# Altium PCB EDR_RFID_READER.PcbDoc
Units mm, origin at the board's own origin, x right, y up, seen from the top; angles counter-clockwise.
Board outline 40 x 62.01 mm, 2 copper layers (Top Layer, Bottom Layer); 23 components, 18 nets, 87 pads, 31 vias.
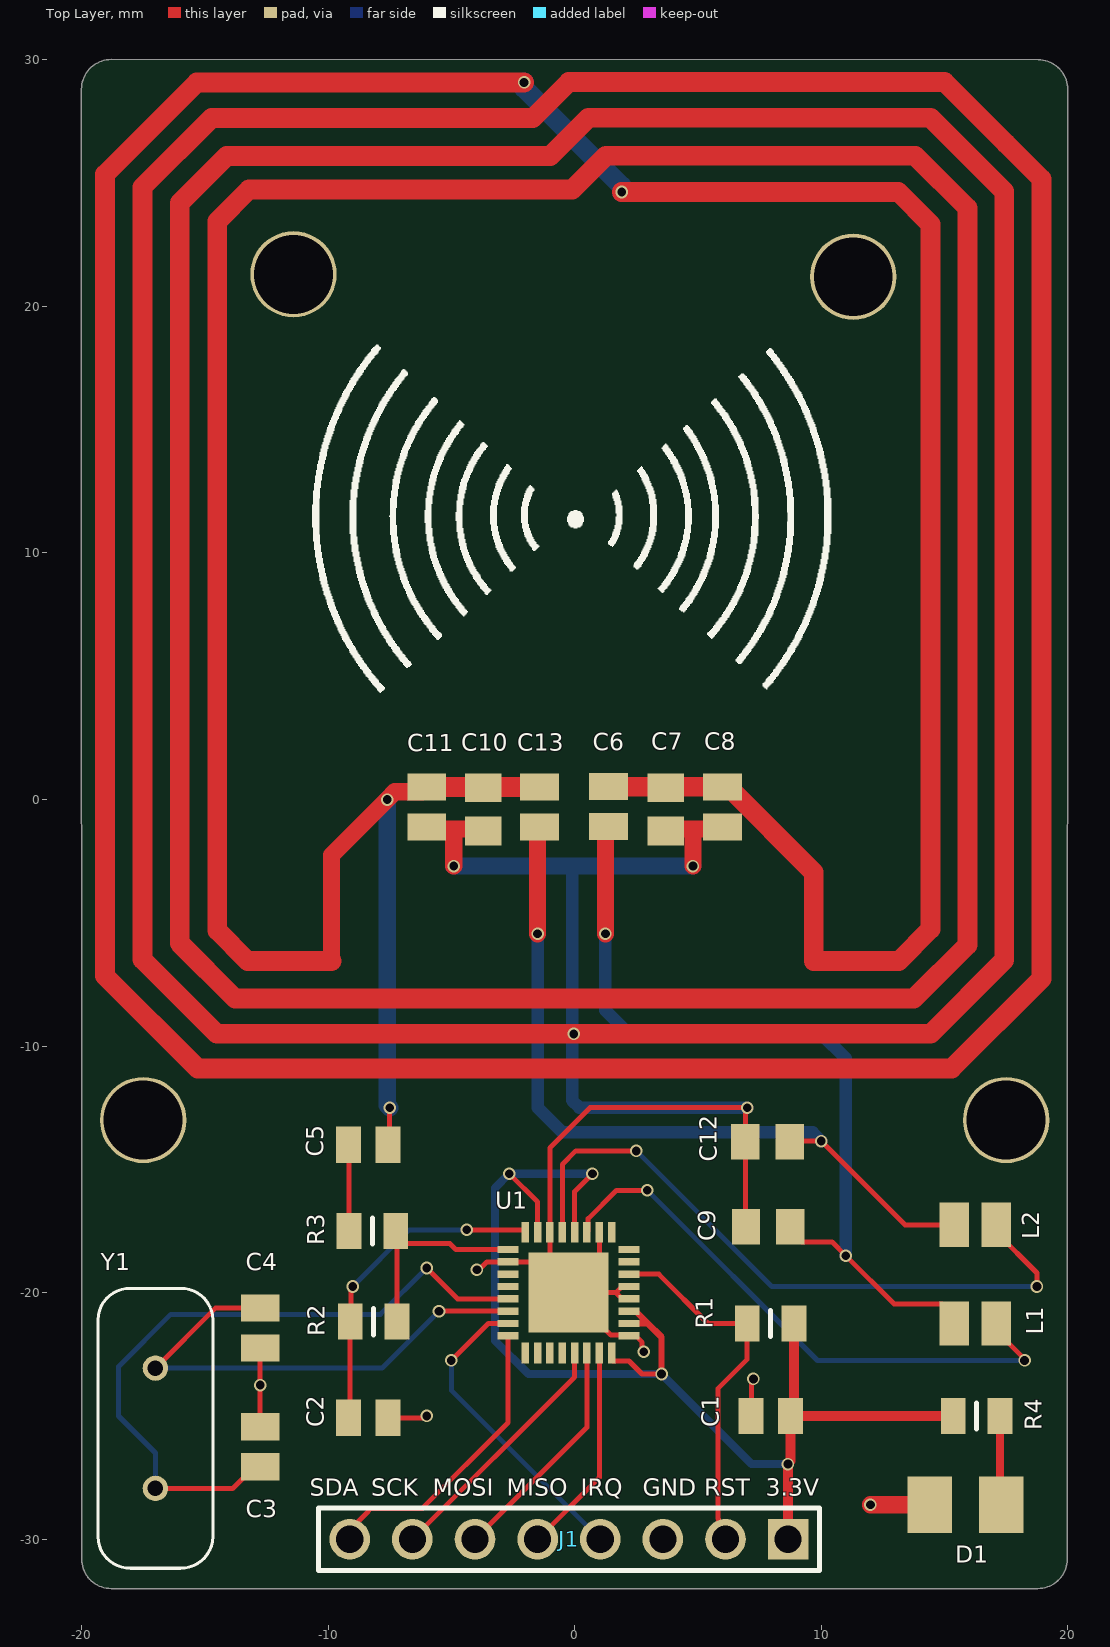
[diagram p0: Top Layer view]
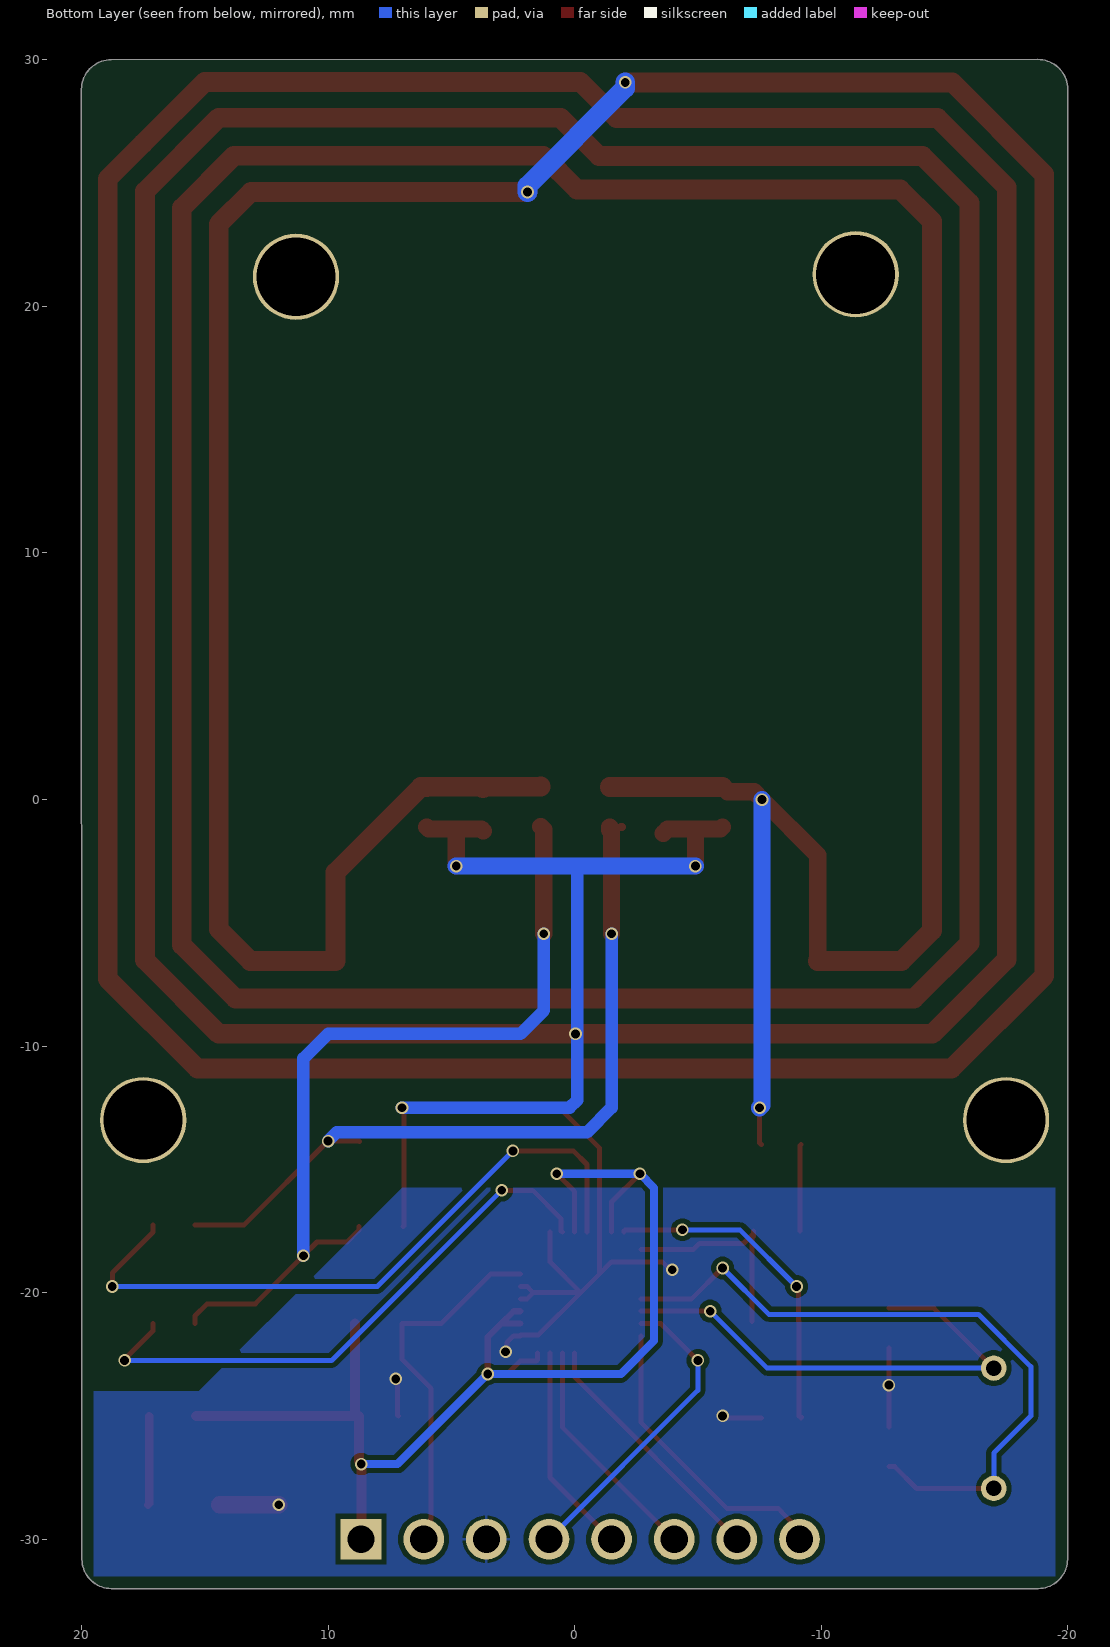
[diagram p1: Bottom Layer view, seen from below]
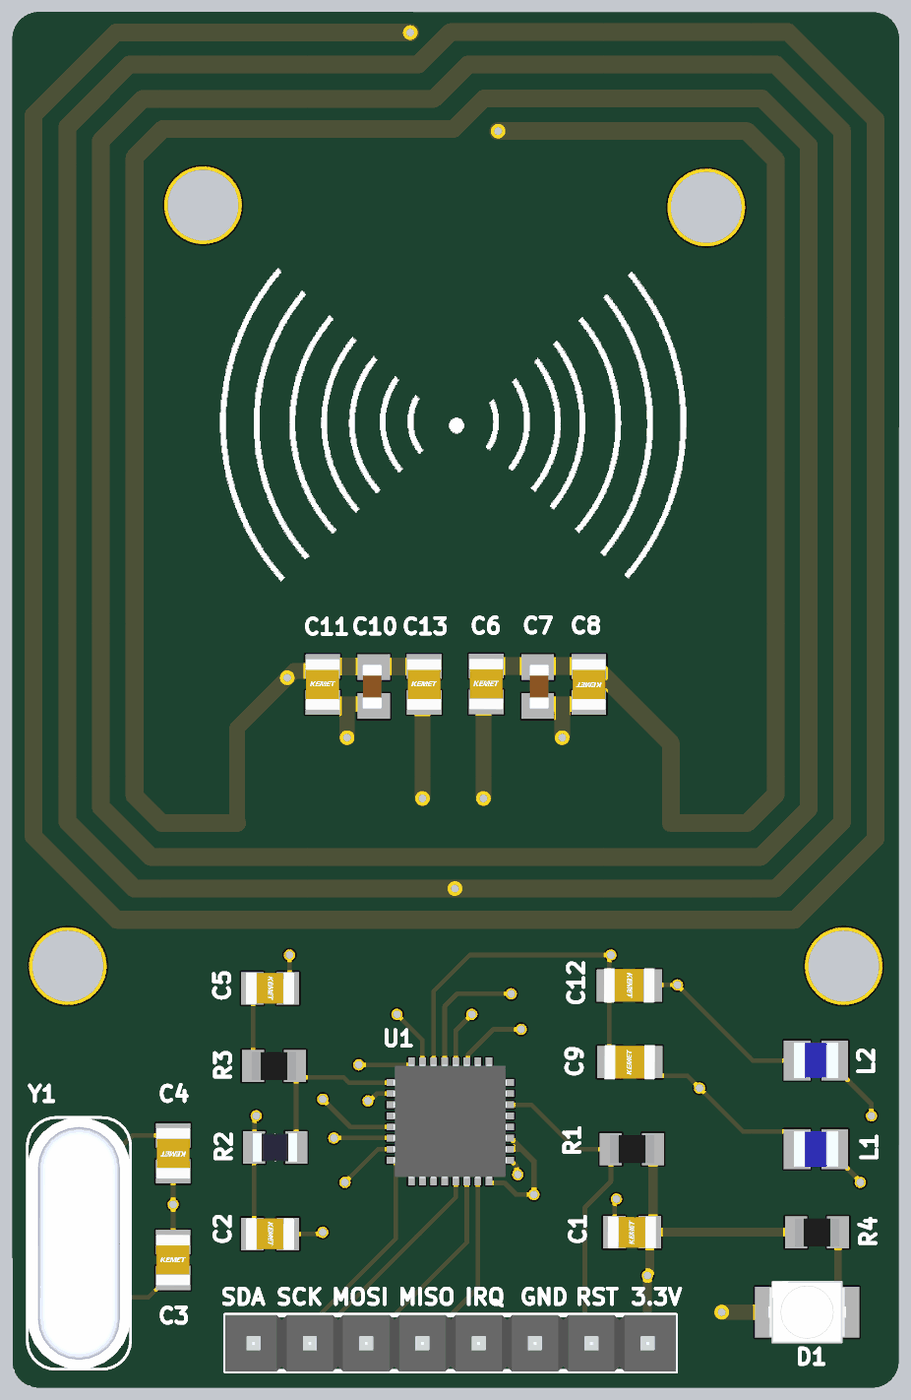
[diagram p2: 3D render of the assembled board from above, using the file's embedded part models]

## Layer stack, top to bottom
Top Solder: solder mask 0.0102, Solder Resist, Dk 3.5
Top Layer: signal copper 0.0356
Dielectric 1: dielectric 0.32, FR-4, Dk 4.8
Bottom Layer: signal copper 0.0356
Bottom Solder: solder mask 0.0102, Solder Resist, Dk 3.5

## Board outline
-19.993,-30.807 ccw(c-18.8,-30.807) -18.8,-32 18.79,-32 ccw(c18.79,-30.81) 19.98,-30.81 20,28.8 ccw(c18.8,28.8) 18.8,30 -18.79,30.014 ccw(c-18.79,28.804) -20,28.804

## Design rules (kind name [scope] priority, off if disabled: settings)
BoardOutlineClearance [All] p1: gap=0.2 ignorepadtopadclearanceinfootprint=FALSE
Clearance [All] p1: gap=0.2 ignorepadtopadclearanceinfootprint=FALSE except(0.127: Arc-Text Track-Text SMDPad-Text THPad-Text Via-Text Fill-Text Poly-Text Region-Text Text-Text; 0.17: SMDPad-SMDPad; 0.25: Arc-Hole Track-Hole SMDPad-Hole THPad-Hole Via-Hole Fill-Hole Poly-Hole Region-Hole Text-Hole)
ComponentClearance [All] p1: gap=0.127 collisioncheckmode=3 verticalgap=0.127 showdistances=TRUE
DiffPairsRouting [All] p1: maxlimit=0.254 minlimit=0.127 mostfreqgap=0.127 toplayer_minwidth=0.127 toplayer_maxwidth=25.4 toplayer_prefwidth=0.127 bottomlayer_minwidth=0.127 bottomlayer_maxwidth=25.4 bottomlayer_prefwidth=0.127 maxuncoupledlength=12.7
Height [All] p1: minheight=0 maxheight=1816.048 prefheight=12.7
HoleSize [All] p1: absolutevalues=TRUE maxlimit=6.3 minlimit=0.3 maxpercent=80.000 minpercent=20.000
HoleToHoleClearance [All] p1: gap=0.25 allowstackedmicrovias=FALSE
MinimumAnnularRing [All] p1: minimumring=0.076
MinimumSolderMaskSliver [All] p1: minsoldermaskwidth=0
PlaneClearance [All] p1: clearance=0.127
PlaneConnect PlaneConnectPowerPads [InPadClass('PowerPads')] p1: planeconnectstyle=Direct reliefexpansion=0.508 reliefentries=4 reliefconductorwidth=0.254 reliefairgap=0.254
PlaneConnect [All] p2: pad.planeconnectstyle=Relief pad.reliefexpansion=0.3 pad.reliefentries=4 pad.reliefconductorwidth=0.127 pad.reliefairgap=0.127 via.planeconnectstyle=Direct via.reliefexpansion=0.3 via.reliefentries=4 via.reliefconductorwidth=0.127 via.reliefairgap=0.127
PolygonConnect PolygonConnectPowerPads [All vs (InPadClass('PowerPads'))] p1: connectstyle=Direct reliefconductorwidth=0.254 reliefentries=4 polygonreliefangle="90 Angle" airgapwidth=0.254
PolygonConnect [All] p2: thpad.connectstyle=Relief thpad.reliefconductorwidth=0.127 thpad.reliefentries=4 thpad.polygonreliefangle="90 Angle" thpad.airgapwidth=0.127 smdpad.connectstyle=Relief smdpad.reliefconductorwidth=0.127 smdpad.reliefentries=4 smdpad.polygonreliefangle="90 Angle" smdpad.airgapwidth=0.127 via.connectstyle=Direct via.reliefconductorwidth=0.127 via.reliefentries=4 via.polygonreliefangle="90 Angle" via.airgapwidth=0.127
RoutingVias [All] p1: holewidth=0.3 width=0.6 viastyle="Through Hole" minholewidth=0.3 minwidth=0.6 maxholewidth=0.6 maxwidth=6.6
SilkToSilkClearance [All] p1: silktosilkclearance=0
SilkToSolderMaskClearance [IsPad] p1: minsilkscreentomaskgap=0.127 clearancetoexposedcopper=TRUE
SolderMaskExpansion [All] p1: expansion=0.075 istentingtop=FALSE
Width [All] p1: maxlimit=25.4 minlimit=0.127 preferedwidth=0.127 minimp=50.000000 maximp=50.000000 favimp=50.000000
20 further rules are at their usual default settings.

## Components (designator, comment, footprint, x,y, rotation, side; value= is the part's Value field where it differs from the comment)
C1 "0.1uF" 0.1u 7.95,-25 r0 top
C2 "0.1uF" 0.1u -8.375,-25.075 r180 top
C3 "15pF" 15pf -12.75,-26.25 r270 top
C4 "15pF" 15pf -12.75,-21.44 r90 top
C5 "0.1uF" 0.1u -8.375,-14 r180 top
C6 "15pF" 15pf 1.375,-0.285 r270 top
C7 "10pF" 10pf 3.7,-0.4 r90 top
C8 "180pf" 15pf 6,-0.3 r90 top
C9 "47pF" 47PF 7.85,-17.325 r0 top
C10 "10pF" 10pf -3.7,-0.4 r270 top
C11 "180pF" 15pf -6,-0.3 r270 top
C12 "47pF" 47PF 7.825,-13.875 r180 top
C13 "15pF" 15pf -1.425,-0.3 r270 top
D1 "150141BS73100" LEDM3528X210N 15.85,-28.6 r0 top
J1 "PIN_OUT" 8X1 8.66,-30 r180 top
L1 "2.2uH" 2.2U 16.25,-21.25 r0 top
L2 "2.2uH" 2.2U 16.25,-17.25 r0 top
R1 "10K" 10k 7.95,-21.25 r0 top
R2 "820R" 820 -8.15,-21.175 r180 top
R3 "5.1K" 5.1k -8.2,-17.5 r0 top
R4 "5R" 1k 16.3,-25 r180 top
U1 "MFRC52202HN1,115" MFRC522 -0.25,-20 r180 top
Y1 "27.120MHz" 27.120 -17,-25.5 r90 top

## Footprints (in the part's own frame and the unit in brackets; to place one, negate y for a bottom-side part, rotate by r counter-clockwise, add the part's x,y. Pads: shape width x height; smd on the part's side, far side on the other; paste and mask are expansions set on the pad)
0.1u [mm]
  rect 1.02x1.47 smd: 1(-0.8,0) 2(0.8,0)
  body extent -1.1,-0.73 1.1,0.72, height 0.88
1k [mm]
  rect 1x1.45 smd: 1(-0.95,0) 2(0.95,0)
  silkscreen extent 0,-0.53 0,0.53, body extent -1,-0.63 1,0.63, height 0.5
2.2U [mm]
  rect 1.2x1.8 smd: 1(-0.85,0) 2(0.85,0)
  body extent -1,-0.8 1,0.8, height 1
5.1k [mm]
  rect 1x1.45 smd: 1(-0.95,0) 2(0.95,0)
  silkscreen extent 0,-0.53 0,0.53, body extent -1,-0.63 1,0.63, height 0.5
8X1 [mm]
  rect 1.65x1.65 hole 1.1: 1(0,0)
  round 1.65 hole 1.1: 2(2.54,0) 3(5.08,0) 4(7.62,0) 5(10.16,0) 6(12.7,0) 7(15.24,0) 8(17.78,0)
  silkscreen extent -1.27,-1.27 19.05,1.27, body extent -1.27,-1.27 19.05,1.27, height 8.54
10k [mm]
  rect 1x1.45 smd: 1(-0.95,0) 2(0.95,0)
  silkscreen extent 0,-0.53 0,0.53, body extent -1,-0.63 1,0.63, height 0.5
10pf [mm]
  rect 1.16x1.47 smd: 1(-0.875,0) 2(0.875,0)
  body extent -1,-0.51 1,0.37, height 1.26
15pf [mm]
  rect 1.1x1.57 smd: 1(-0.81,0) 2(0.81,0)
  body extent -1.15,-0.78 1.15,0.77, height 0.98
27.120 [mm]
  round 1.03 hole 0.63: 1(-2.44,0) 2(2.44,0)
  silkscreen extent -5.68,-2.33 5.68,2.33, body extent -5.68,-2.32 5.68,2.32, height 3.63
47PF [mm]
  rect 1.15x1.45 smd: 1(-0.9,0) 2(0.9,0)
  body extent -1.15,-0.78 1.15,0.77, height 0.98
820 [mm]
  rect 1x1.45 smd: 1(-0.95,0) 2(0.95,0)
  silkscreen extent 0,-0.54 0,0.54, body extent -1,-0.64 1,0.64, height 0.65
LEDM3528X210N [mm]
  rect 1.8x2.3 smd: 1(-1.45,0) 2(1.45,0)
  body extent -1.75,-1.4 1.75,1.4, height 1.9
MFRC522 [mm]
  rect 0.85x0.3 smd: 1(-2.45,1.75) 2(-2.45,1.25) 3(-2.45,0.75) 4(-2.45,0.25) 5(-2.45,-0.25) 6(-2.45,-0.75) 7(-2.45,-1.25) 8(-2.45,-1.75) 17(2.45,-1.75) 18(2.45,-1.25) 19(2.45,-0.75) 20(2.45,-0.25) 21(2.45,0.25) 22(2.45,0.75) 23(2.45,1.25) 24(2.45,1.75)
  rect 0.3x0.85 smd: 9(-1.75,-2.45) 10(-1.25,-2.45) 11(-0.75,-2.45) 12(-0.25,-2.45) 13(0.25,-2.45) 14(0.75,-2.45) 15(1.25,-2.45) 16(1.75,-2.45) 25(1.75,2.45) 26(1.25,2.45) 27(0.75,2.45) 28(0.25,2.45) 29(-0.25,2.45) 30(-0.75,2.45) 31(-1.25,2.45) 32(-1.75,2.45)
  rect 3.25x3.25 smd: 33(0,0)
  body extent -2.55,-2.55 2.55,2.55, height 1

## Part data
C1 C2 C5: "Capacitor", Manufacturer_Name=KEMET, Manufacturer_Part_Number=C0603C104K1RACTU, Mouser Part Number=80-C0603C104K1RACTU, Datasheet Link=https://search.kemet.com/component-documentation/download/specsheet/C0603C104K1RACTU, Height=0.95mm, Mouser Price/Stock=https://www.mouser.co.uk/ProductDetail/KEMET/C0603C104K1RACTU?qs=ulEaXIWI0c%252BGZAOcX%252BBs5A%3D%3D
C3 C4 C6 C13: library part C0805X150F4HACAUTO, "Capacitor", Manufacturer_Name=KEMET, Mouser Part Number=80-C0805X150F4HAUTO, Datasheet Link=https://www.kemet.com/specsheet/C0805X150F4HACAUTO, Height=0.98mm, Manufacturer_Part_Number=C0805X150F4HACAUTO, Mouser Price/Stock=https://www.mouser.co.uk/ProductDetail/KEMET/C0805X150F4HACAUTO?qs=r5DSvlrkXmKlHoNfpD1G%252BA%3D%3D
C7 C10: library part C0805C100J5GACTU, "Ceramic Multilayer Capacitor; Capacitor Type:General Purpose; Capacitance:10pF; Capacitance Tolerance:Â± 5%; Voltage Rating:50V; Capacitor Dielectric Type:Multilayer Ceramic; Package/Case:0805; Termination Type:SMD ;RoHS Compliant: Yes", Package=None, Availability=Unavailable, MP=C0805C100J5GACTU, Price=None
C8 C11: library part C0805C181F1GACTU, "Capacitor", Manufacturer_Name=KEMET, Datasheet Link=https://content.kemet.com/datasheets/KEM_C1003_C0G_SMD.pdf, Height=1.1mm, Manufacturer_Part_Number=C0805C181F1GACTU
C9 C12: library part C0805C470JDGACTU, "Capacitor", Manufacturer_Name=KEMET, Mouser Part Number=80-C0805C470JDG, Datasheet Link=https://content.kemet.com/datasheets/KEM_C1009_C0G_HV_SMD.pdf, Height=1.1mm, Manufacturer_Part_Number=C0805C470JDGACTU, Mouser Price/Stock=https://www.mouser.co.uk/ProductDetail/KEMET/C0805C470JDGACTU?qs=HkDAmeg8w%252BfhZX5bPX%2F3Fg%3D%3D
D1: "LED", Manufacturer_Name="Wurth Elektronik", Mouser Part Number=710-150141BS73100, Datasheet Link=http://katalog.we-online.de/led/datasheet/150141BS73100.pdf, Height=2.1mm, Manufacturer_Part_Number=150141BS73100, Mouser Price/Stock=https://www.mouser.co.uk/ProductDetail/Wurth-Elektronik/150141BS73100?qs=2kOmHSv6VfT0lsqABpjXuQ%3D%3D
J1: library part 61300811121_1, "Connector", Manufacturer_Name="Wurth Elektronik", Manufacturer_Part_Number=61300811121, Mouser Part Number=710-61300811121, Datasheet Link=http://katalog.we-online.de/em/datasheet/6130xx11121.pdf, Height=8.54mm, Mouser Price/Stock=https://www.mouser.co.uk/ProductDetail/Wurth-Elektronik/61300811121?qs=PhR8RmCirEZRdx%252BVlEmRRA%3D%3D
L1 L2: library part ASMPM-0806-2R2M-T, "Inductor", Manufacturer_Name=ABRACON, Mouser Part Number=815-ASMPM-0806-2.2MT, Arrow Part Number=ASMPM-0806-2R2M-T, Arrow Price/Stock=https://www.arrow.com/en/products/asmpm-0806-2r2m-t/abracon, Datasheet Link=https://abracon.com/Magnetics/power/ASMPM.pdf, Height=1mm, Manufacturer_Part_Number=ASMPM-0806-2R2M-T, Mouser Price/Stock=https://www.mouser.co.uk/ProductDetail/ABRACON/ASMPM-0806-2R2M-T?qs=f9yNj16SXrKN59zM%2FB%252B15A%3D%3D
R1: library part CR0805-FX-1002ELF, "Resistor", Manufacturer_Name=Bourns, Mouser Part Number=652-CR0805FX-1002ELF, Arrow Part Number=CR0805-FX-1002ELF, Arrow Price/Stock=https://www.arrow.com/en/products/cr0805-fx-1002elf/bourns?region=nac, Datasheet Link=https://www.bourns.com/pdfs/chpreztr.pdf, Height=0.6mm, Manufacturer_Part_Number=CR0805-FX-1002ELF, Mouser Price/Stock=https://www.mouser.co.uk/ProductDetail/Bourns/CR0805-FX-1002ELF?qs=tknLyCMIRbPr%252BDD0s0nG9g%3D%3D
R2: library part 0805W8F8200T5E, "Resistor", Manufacturer_Name="UNI-ROYAL(Uniroyal Elec)", Datasheet Link=https://datasheet.lcsc.com/szlcsc/Uniroyal-Elec-0805W8F8200T5E_C17837.pdf, Height=0.65mm, Manufacturer_Part_Number=0805W8F8200T5E
R3: library part CR0805-FX-5101ELF, "Resistor", Manufacturer_Name=Bourns, Mouser Part Number=652-CR0805FX-5101ELF, Arrow Part Number=CR0805-FX-5101ELF, Arrow Price/Stock=https://www.arrow.com/en/products/cr0805-fx-5101elf/bourns?region=nac, Datasheet Link=https://www.bourns.com/pdfs/chpreztr.pdf, Height=0.6mm, Manufacturer_Part_Number=CR0805-FX-5101ELF, Mouser Price/Stock=https://www.mouser.co.uk/ProductDetail/Bourns/CR0805-FX-5101ELF?qs=LA9FZBosJlADRz3sArKRTQ%3D%3D
R4: library part CHP0805AFX-1002ELF1k, "Resistor", Manufacturer_Name=Bourns, Manufacturer_Part_Number=CHP0805AFX-1002ELF, Mouser Part Number=652-CHP0805AFX1002EL, Datasheet Link=https://th.mouser.com/datasheet/2/54/chp-a-1858677.pdf, Height=0.6mm, Mouser Price/Stock=https://www.mouser.co.uk/ProductDetail/Bourns/CHP0805AFX-1002ELF?qs=BJlw7L4Cy79Jv8LZuArCYQ%3D%3D
U1: "Integrated Circuit", Manufacturer_Name=NXP, Mouser Part Number=771-MFRC52202HN1115, Arrow Part Number=MFRC52202HN1,115, Arrow Price/Stock=https://www.arrow.com/en/products/mfrc52202hn1115/nxp-semiconductors?region=nac, Datasheet Link=http://www.nxp.com/docs/en/data-sheet/MFRC522.pdf, Height=1mm, Manufacturer_Part_Number=MFRC52202HN1,115, Mouser Price/Stock=https://www.mouser.co.uk/ProductDetail/NXP-Semiconductors/MFRC52202HN1115?qs=cbprxTG2Yq%2F%252BkR%2FEgMbBLA%3D%3D
Y1: library part ABLS-27.120MHZ-B4-F-T, "Crystal or Oscillator", Manufacturer_Name=ABRACON, Mouser Part Number=815-ABLS27120MHZB4FT, Arrow Part Number=ABLS-27.120MHZ-B4-F-T, Arrow Price/Stock=https://www.arrow.com/en/products/abls-27.120mhz-b4-f-t/abracon?region=nac, Datasheet Link=https://abracon.com/Resonators/abls.pdf, Manufacturer_Part_Number=ABLS-27.120MHZ-B4-F-T, Mouser Price/Stock=https://www.mouser.co.uk/ProductDetail/ABRACON/ABLS-27.120MHZ-B4-F-T?qs=vmHwEFxEFR8KmFALP9AakA%3D%3D

## Free pads (board coordinates)
  round 3.5 hole 3.2: ""(-17.5,-13) ""(-11.4,21.3) ""(11.3,21.2) ""(17.5,-13)

## Via types
v1: diameter 0.508, hole 0.356, Top Layer to Bottom Layer, 31 vias

## Nets (pads, with @x,y where several pads share a name; then routed paths per layer and width w, separated by ;. In a path a pad name is that pad's centre, name@x,y a point inside that pad or via, vN(x,y) a via of type N, cw(c..) or ccw(c..) an arc to the next point about the centre after c; other vN are vias at no path point)
+3.3V: C1.2 J1.1 R1.2 R4.2 U1.2 U1.3 U1.12 U1.15 U1.32 | length 51.9
  Top Layer w0.203: v1(-2.65,-15.175) -1.5,-16.325 U1.15 ; U1.12 0,-15.9 v1(0.725,-15.175) ; U1.32 1.5,-22.725 1.548,-22.773 2.206,-22.773 2.731,-23.299 v1(3.525,-23.299)
  Top Layer w0.254: U1.2 2.975,-21.25 ; U1.3 2.475,-20.75 2.975,-21.25 ; v1(3.525,-23.299) 3.525,-21.8 2.975,-21.25
  Top Layer w0.33: J1.1@8.65,-29.99 J1.1 ; v1(8.65,-26.95) 8.65,-26.936 v1@8.75,-26.836 ; C1.2 C1.2@8.9,-24.85
  Top Layer w0.406: J1.1@8.65,-29.99 v1(8.65,-26.95) ; v1@8.75,-26.836 C1.2 R4.2 ; C1.2@8.9,-24.85 R1.2
  Bottom Layer w0.33: v1(0.725,-15.175) v1(-2.65,-15.175) -3.225,-15.75 -3.225,-21.95 -1.876,-23.299 v1(3.525,-23.299) 7.176,-26.95 v1(8.65,-26.95)
GND: C1.1 C2.1 C3.1 C4.1 C5.1 C6.1 C7.1 C7.2 C8.1 C8.2 C9.1 C10.1 C10.2 C11.1 C11.2 C12.2 C13.1 D1.1 J1.3 U1.1 U1.4 U1.5 U1.10 U1.14 U1.18 U1.33 | length 630.9
  Top Layer w0.203: C3.1 v1(-12.75,-23.75) C4.1 C4.1@-12.745,-22.255 ; C2.1 v1@-6.125,-25.075 ; C5.1 -7.5,-13.925 v1(-7.5,-12.5) ; v1(-3.962,-19.075) -3.88,-19.075 -3.555,-18.75 -1.5,-18.75 U1.33@-1,-19.25 ; U1.10 1,-18.75 U1.33 ; U1.4 1.925,-20.25 1.68,-20.005 1.68,-20 ; U1.5 1.925,-19.75 1.877,-19.798 1.877,-19.803 1.68,-20 ; v1(2.8,-22.4) 2.742,-22.342 2.742,-22.017 2.475,-21.75 U1.1 2.17,-21.72 1.47,-21.72 U1.33 ; C9.1 6.925,-17.3 C12.2 6.925,-12.623 7,-12.548 v1(7,-12.5) 0.625,-12.5 -1,-14.125 U1.14 U1.33@-1,-19.25 ; C1.1 7.175,-24.975 7.175,-23.623 7.25,-23.548 v1(7.25,-23.5) ; U1.33@-1,-19.25 U1.33 ; U1.33 1.68,-20
  Top Layer w0.7: -9.86,-6.545 -9.86,-2.26 v1(-7.6,0) -7.29,0.31 -6.2,0.31 C11.1 ; C11.2 -5.918,-1.192 -4.85,-1.192 ; v1(-4.9,-2.7) -4.9,-1.242 -4.85,-1.192 ; C10.2@-3.6,-1.375 C10.2 -3.782,-1.192 -4.85,-1.192 ; C7.1 3.782,-1.192 4.85,-1.192 ; v1(4.8,-2.7) 4.8,-1.242 4.85,-1.192 ; C8.1 5.918,-1.192 4.85,-1.192 ; v1(12,-28.6) D1.1
  Top Layer w0.8: -9.86,-6.545 -13.261,-6.545 -14.491,-5.315 -14.491,23.452 -13.205,24.738 -0.097,24.738 1.271,26.107 13.813,26.107 15.93,23.99 15.93,-5.897 13.753,-8.074 -13.767,-8.074 -16.013,-5.828 -16.013,24.195 -14.108,26.101 -0.986,26.101 0.565,27.651 14.437,27.651 17.424,24.664 17.424,-6.513 14.432,-9.505 v1(-0.036,-9.505) -14.504,-9.505 -17.521,-6.487 -17.521,24.835 -14.717,27.64 -1.695,27.64 -0.233,29.102 15,29.102 17.5,26.602 ; C11.1 C13.1 ; v1(-2.05,29.081) -15.32,29.081 -19.047,25.353 -19.047,-7.15 -15.285,-10.912 13.112,-10.912 ; C6.1 1.382,0.518 5.993,0.518 C8.2 6.235,0.51 9.7,-2.955 9.7,-6.545 13.151,-6.545 14.437,-5.258 14.437,23.33 13.128,24.639 v1(1.91,24.639) ; C7.2 C7.2@3.715,0.46 ; 13.1,-10.9 13.112,-10.912 ; 17.5,26.6 17.5,26.602 ; 13.112,-10.912 15.293,-10.912 18.937,-7.269 18.937,25.165 17.5,26.602
  Bottom Layer w0.508: -0.1,-2.9 -0.1,-12.202 0.198,-12.5 v1(7,-12.5)
  Bottom Layer w0.7: v1(-7.6,0) -7.6,-12.4 v1(-7.5,-12.5) ; v1(-4.9,-2.7) v1(4.8,-2.7)
  Bottom Layer w0.8: v1(-2.05,29.081) -2.05,28.85 1.91,24.89 v1(1.91,24.639)
  other v1: -6,-25
IRQ: J1.4 U1.23 | length 12.7
  Top Layer w0.203: v1(-5,-22.75) -3.5,-21.25 U1.23
  Bottom Layer w0.203: v1(-5,-22.75) -5,-23.96 J1.4
MISO: J1.5 U1.31 | length 8.6
  Top Layer w0.203: J1.5 1,-27.5 U1.31
MOSI: J1.6 U1.30 | length 9.4
  Top Layer w0.203: J1.6 0.5,-25.46 U1.30
NetC3_2: C3.2 U1.21 Y1.1 | length 28.2
  Top Layer w0.203: Y1.1 -13.865,-27.94 -12.985,-27.06 C3.2 ; v1(-6,-19) -4.75,-20.25 U1.21
  Bottom Layer w0.203: Y1.1 -17,-26.5 -18.5,-25 -18.5,-23 -16.378,-20.878 -7.878,-20.878 v1(-6,-19)
NetC4_2: C4.2 U1.22 Y1.2 | length 20.5
  Top Layer w0.203: Y1.2 -14.57,-20.63 C4.2 ; v1(-5.5,-20.75) U1.22
  Bottom Layer w0.203: Y1.2 -7.81,-23.06 v1(-5.5,-20.75)
NetC5_2: C5.2 R3.1 | length 3.5
  Top Layer w0.203: C5.2 -9.15,-14.025 R3.1
NetC6_2: C6.2 C9.2 L1.1 | length 34.6
  Top Layer w0.203: C9.2 8.75,-17.475 9.223,-17.948 10.448,-17.948 v1(11,-18.5) 12.952,-20.452 14.902,-20.452 15.4,-20.95 L1.1
  Top Layer w0.7: v1(1.25,-5.441) 1.25,-1.22 C6.2
  Bottom Layer w0.508: v1(1.25,-5.441) 1.25,-8.55 2.2,-9.5 10,-9.5 11,-10.5 v1(11,-18.5)
NetC12_1: C12.1 C13.2 L2.1 | length 31.6
  Top Layer w0.203: C12.1 8.75,-13.85 v1(10,-13.85) 13.4,-17.25 L2.1
  Top Layer w0.33: C13.2@-1.925,-1.11 C13.2@-1.885,-1.11
  Top Layer w0.7: v1(-1.5,-5.441) -1.5,-1.31 -1.425,-1.235 C13.2
  Bottom Layer w0.508: v1(-1.5,-5.441) -1.5,-12.5 -0.5,-13.5 9.65,-13.5 v1(10,-13.85)
NetD1_2: D1.2 R4.1 | length 3.6
  Top Layer w0.33: R4.1 17.25,-28.55 D1.2
RST: J1.2 R1.1 U1.6 | length 15
  Top Layer w0.203: U1.6 3.413,-19.25 5.413,-21.25 R1.1 7,-22.704 5.825,-23.879 5.825,-29.158 5.843,-29.176 5.843,-29.723 J1.2
RX: R2.1 R3.2 U1.17 | length 8.5
  Top Layer w0.203: R3.2 R3.2@-7.25,-17.609 ; R2.1 -7.2,-17.775 -7.25,-17.725 R3.2@-7.25,-17.609 ; U1.17 -4.816,-18.25 -5.059,-18.008 -6.852,-18.008 R3.2@-7.25,-17.609
SCK: J1.7 U1.29 | length 10.3
  Top Layer w0.203: J1.7 0,-23.42 U1.29
SDA: J1.8 U1.24 | length 12.1
  Top Layer w0.203: J1.8 -9.12,-29.62 -8.381,-28.881 -8.381,-28.869 -8.262,-28.75 -6.175,-28.75 -2.7,-25.275
  Top Layer w0.204: -2.7,-25.275 U1.24
TX1: L1.2 U1.11 | length 23.6
  Top Layer w0.203: U1.11 0.548,-17.502 0.548,-17 1.698,-15.85 v1(2.95,-15.85) ; L1.2 17.1,-21.55 18.216,-22.666 18.216,-22.716 v1(18.25,-22.75)
  Bottom Layer w0.203: v1(2.95,-15.85) 9.85,-22.75 v1(18.25,-22.75)
TX2: L2.2 U1.13 | length 27.7
  Top Layer w0.203: U1.13 -0.5,-14.8 0.05,-14.25 v1(2.5,-14.25) ; L2.2 17.1,-17.55 18.75,-19.2 v1(18.75,-19.75)
  Bottom Layer w0.203: v1(2.5,-14.25) 8,-19.75 v1(18.75,-19.75)
VMID: C2.2 R2.2 U1.16 | length 13.5
  Top Layer w0.203: C2.2@-9.2,-25.05 C2.2 -9.1,-25 R2.2 -9.075,-21.15 -9.075,-19.873 -9,-19.798 v1(-9,-19.75) ; v1(-4.375,-17.45) -2.048,-17.45 -2,-17.498 U1.16
  Bottom Layer w0.203: v1(-9,-19.75) -6.7,-17.45 v1(-4.375,-17.45)
pads on no net: U1.7 U1.8 U1.9 U1.19 U1.20 U1.25 U1.26 U1.27 U1.28

## Polygon pours and split planes (outlines as drawn)
GND on Bottom Layer "NONET_L-01_P-001" (solid, pour order 0): -19.5,-15.75 7,-15.75 15.25,-24 19.5,-24 19.5,-31.5 -19.5,-31.5

## Silkscreen, mask and mechanical layers (free items; w line width, h text height)
Top Overlay:
  drawing of 15 lines, arcs and shapes, not listed
  text "SDA" at -10.746,-28.246 h0.7
  text "SCK" at -8.246,-28.246 h0.7
  text "MOSI" at -5.746,-28.246 h0.7
  text "MISO" at -2.746,-28.246 h0.7
  text "IRQ" at 0.254,-28.246 h0.7
  text "GND" at 2.754,-28.246 h0.7
  text "RST" at 5.254,-28.246 h0.7
  text "3.3V" at 7.754,-28.246 h0.7
Mechanical 1:
  the board outline again, w0.1